# Altium PCB Timebase_PCB.PcbDoc (part 1 of 2)
Units mm, origin at the board's own origin, x right, y up, seen from the top; angles counter-clockwise.
Board outline 50 x 100.01 mm, 4 copper layers (Top Layer, Int1 (GND), Int2 (PWR), Bottom Layer), stack 1.369 mm thick; 60 components, 58 nets, 317 pads, 674 vias.
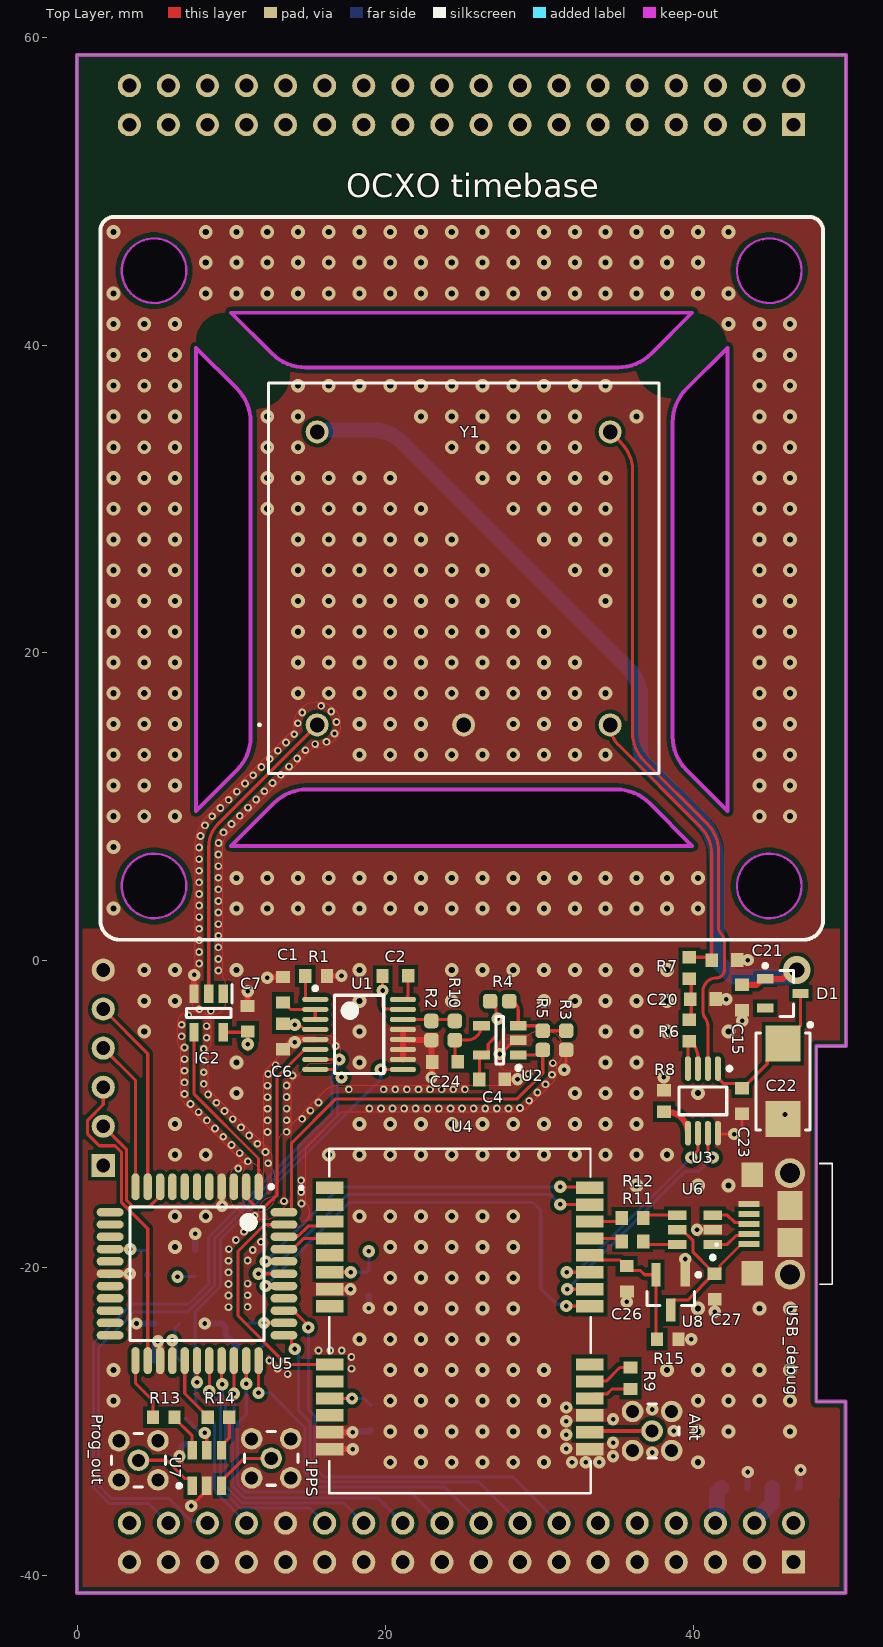
[diagram p0: Top Layer view]
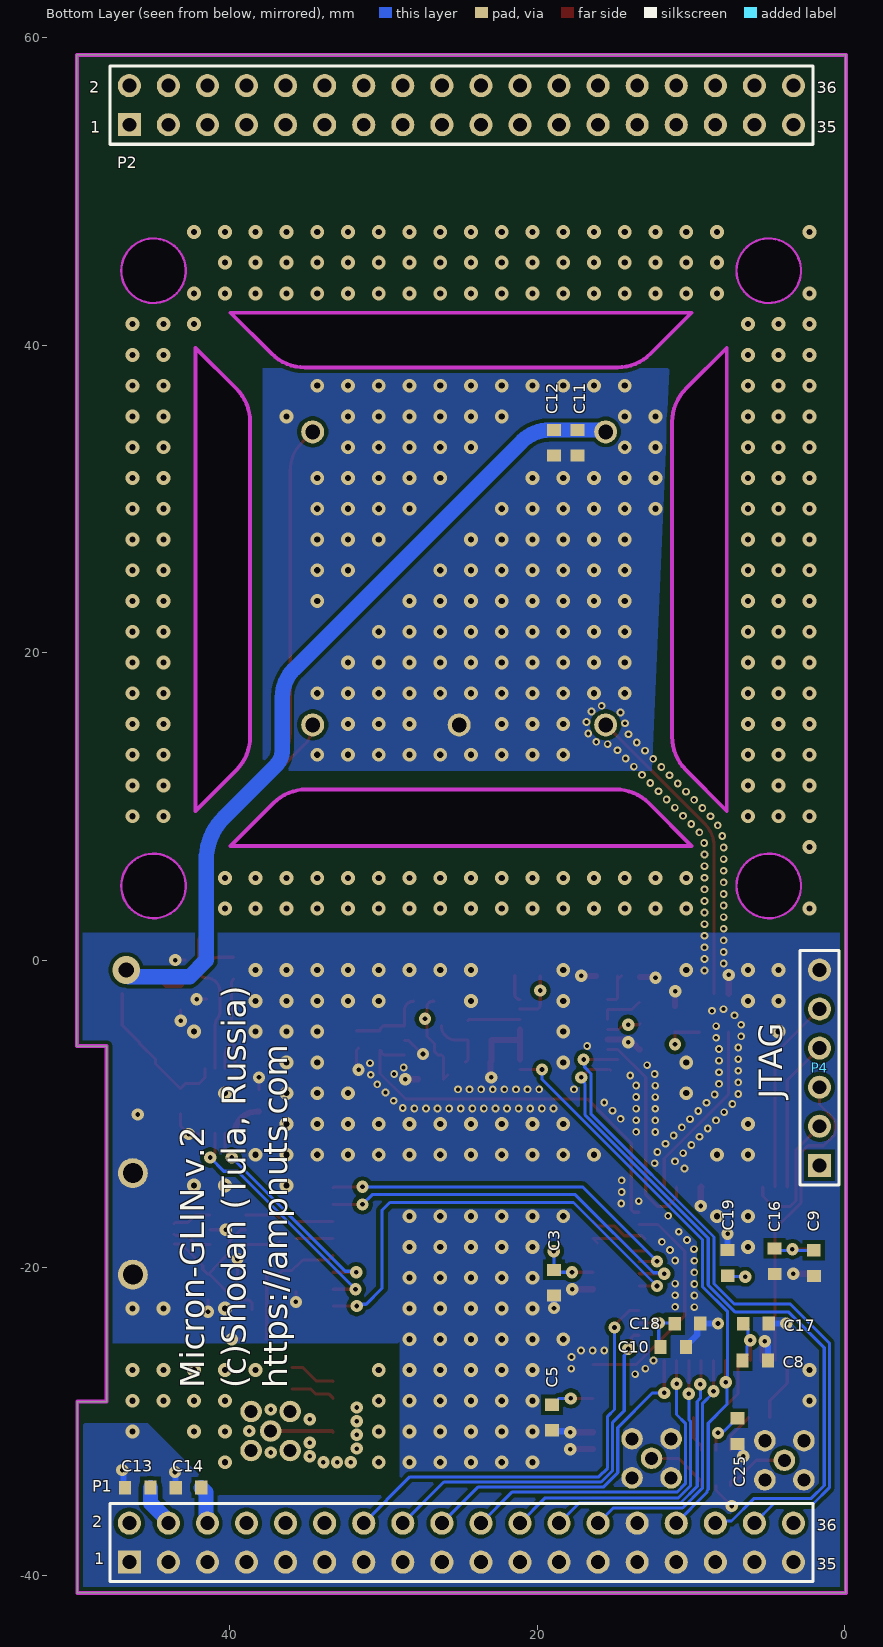
[diagram p1: Bottom Layer view, seen from below]
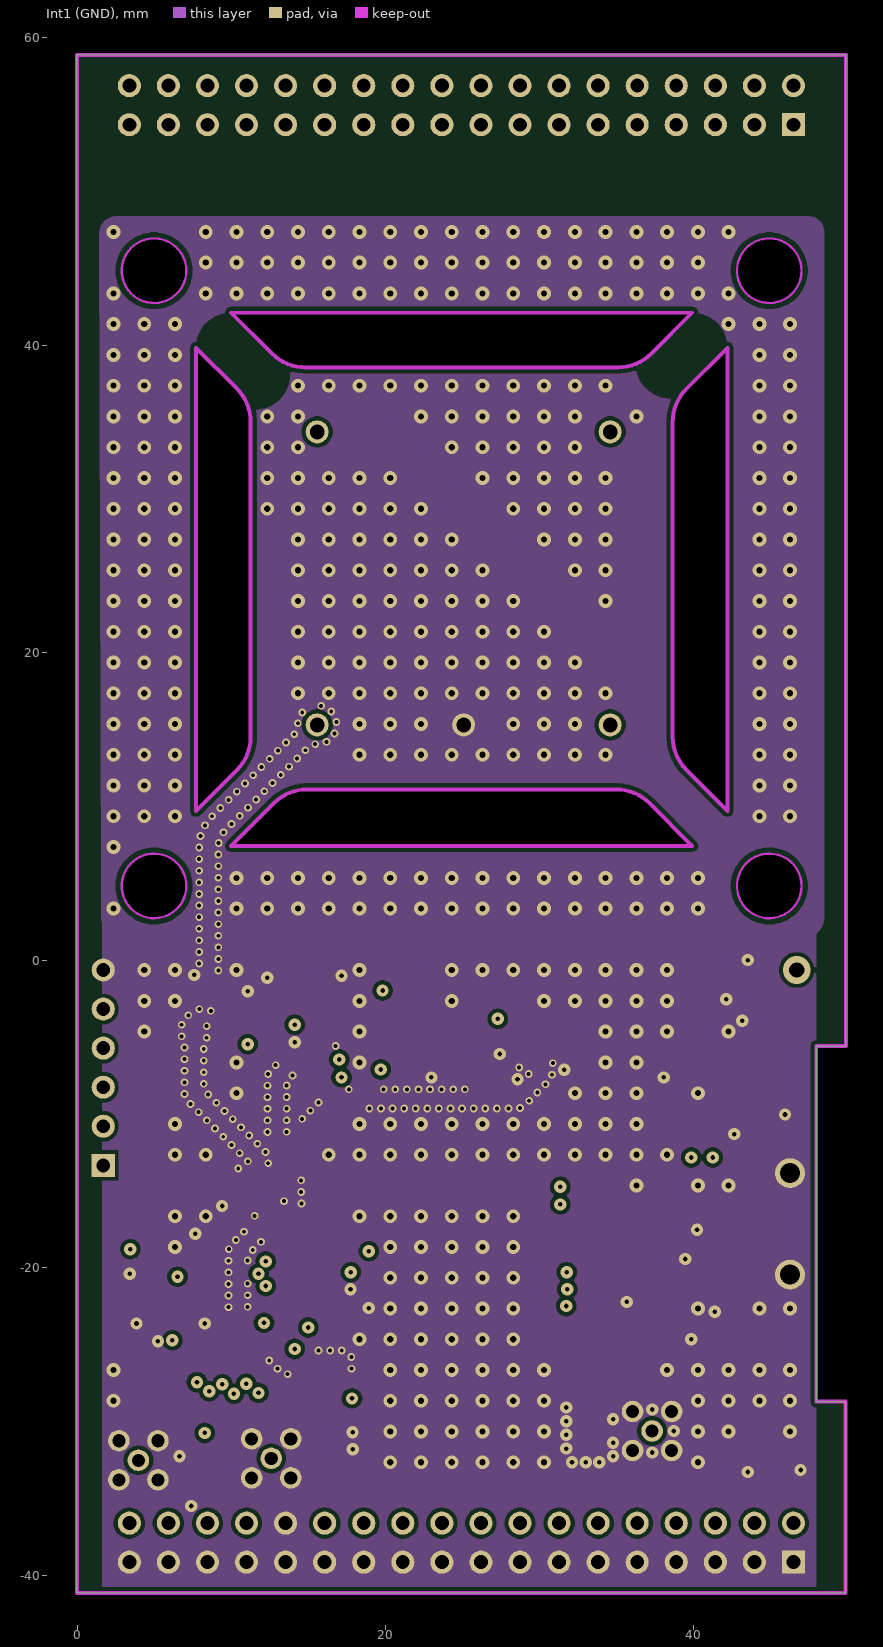
[diagram p2: Int1 (GND)]
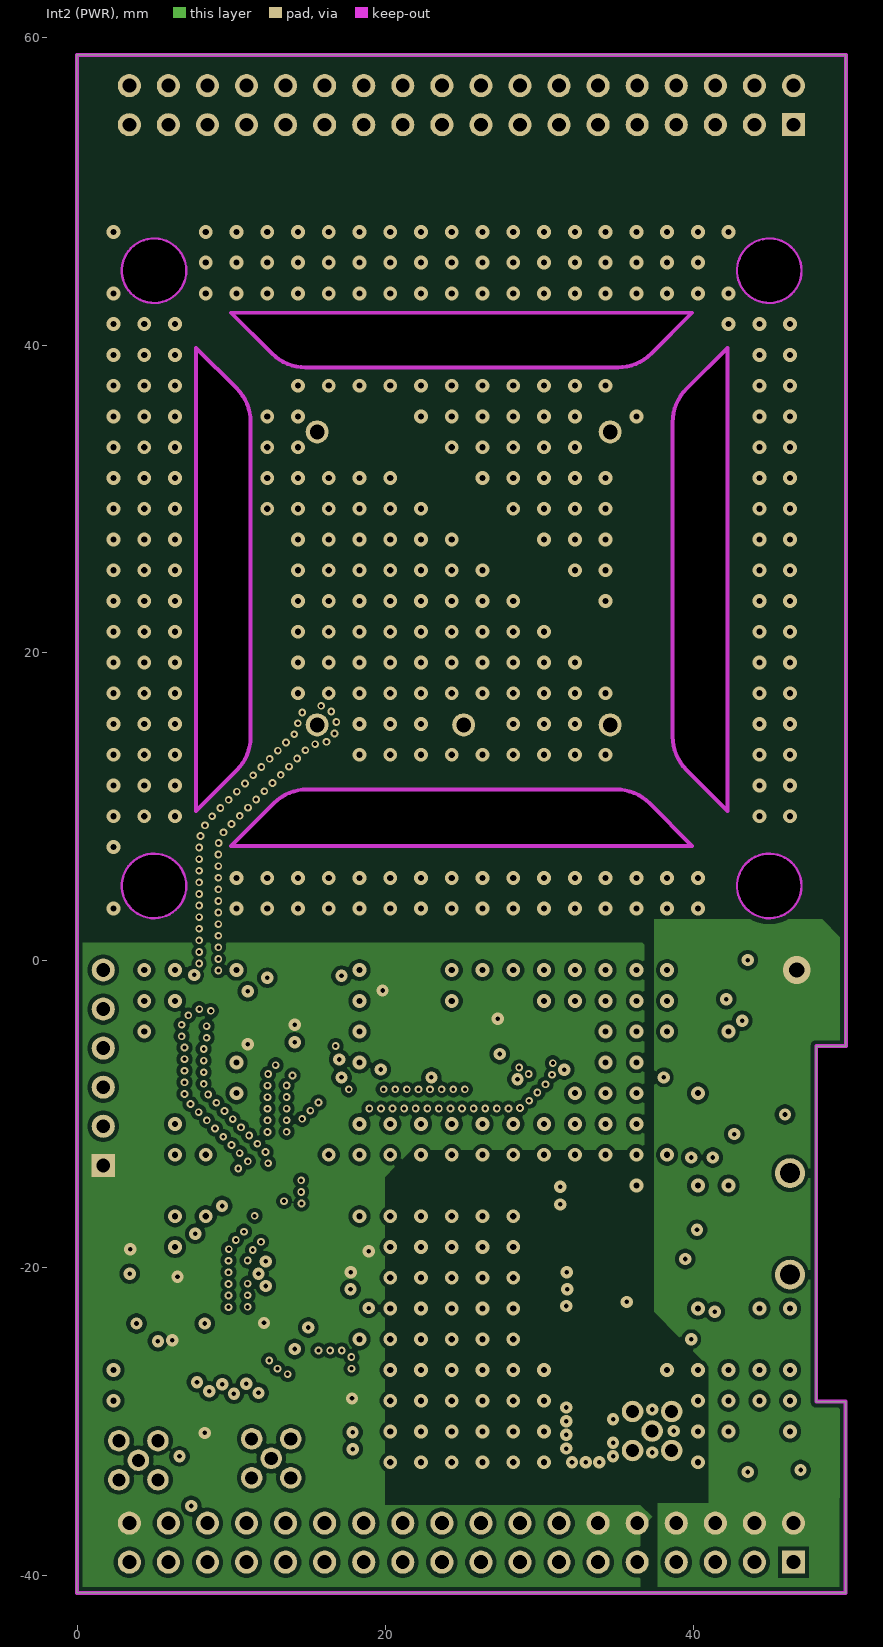
[diagram p3: Int2 (PWR)]

## Layer stack, top to bottom
Top Solder: solder mask 0.0254, SM-001, Dk 4
Top Layer: signal copper 0.035
Dielectric 1: prepreg 0.1295, PP-017, Dk 4.3
Dielectric 2: prepreg 0.1295, PP-017, Dk 4.3
Int1 (GND): signal copper 0.035
Dielectric 3: core 0.7112, Core-039, Dk 4.8
Int2 (PWR): signal copper 0.035
Dielectric 4: prepreg 0.1295, PP-017, Dk 4.3
Dielectric 5: prepreg 0.1295, PP-017, Dk 4.3
Bottom Layer: signal copper 0.035
Bottom Solder: solder mask 0.0254, SM-001, Dk 4

## Board outline
-0.063,-41.136 -0.063,58.864 49.937,58.864 49.937,-5.588 48.006,-5.588 48.006,-28.702 49.911,-28.702 49.911,-41.148 49.899,-41.136
cut-out: 39.57,12.373 cw(c41.738,14.541) 38.672,14.541 38.672,34.988 cw(c41.738,34.988) 39.57,37.156 42.228,39.814 42.228,9.715
cut-out: 9.97,7.429 12.755,10.214 cw(c14.923,8.046) 14.923,11.112 34.989,11.112 cw(c34.989,8.046) 37.157,10.214 39.942,7.429
cut-out: 7.684,9.715 7.684,39.814 10.342,37.156 cw(c8.174,34.988) 11.24,34.988 11.24,14.541 cw(c8.174,14.541) 10.342,12.373
cut-out: 12.628,39.442 ccw(c14.796,41.61) 14.796,38.544 35.116,38.544 ccw(c35.116,41.61) 37.284,39.442 39.942,42.1 9.97,42.1
cut-out: 44.953,42.731 cw(c44.953,44.831) 42.853,44.831 cw(c44.953,44.831) 44.953,46.931 cw(c44.953,44.831) 47.053,44.831 cw(c44.953,44.831)
cut-out: 42.853,4.831 ccw(c44.953,4.831) 44.953,2.731 ccw(c44.953,4.831) 47.053,4.831 ccw(c44.953,4.831) 44.953,6.931 ccw(c44.953,4.831)
cut-out: 4.953,2.731 cw(c4.953,4.831) 2.853,4.831 cw(c4.953,4.831) 4.953,6.931 cw(c4.953,4.831) 7.053,4.831 cw(c4.953,4.831)
cut-out: 4.953,42.731 cw(c4.953,44.831) 2.853,44.831 cw(c4.953,44.831) 4.953,46.931 cw(c4.953,44.831) 7.053,44.831 cw(c4.953,44.831)

## Design rules (kind name [scope] priority, off if disabled: settings)
BoardOutlineClearance [All] p1: gap=0.381 ignorepadtopadclearanceinfootprint=FALSE
Clearance "Clearance Polygons" [InPolygon] p1: gap=0.254 ignorepadtopadclearanceinfootprint=FALSE except(0: Arc-Hole Track-Hole SMDPad-Hole THPad-Hole Via-Hole Fill-Hole Poly-Hole Region-Hole Text-Hole)
Clearance [All] p2: gap=0.127 ignorepadtopadclearanceinfootprint=FALSE except(0: Arc-Hole Track-Hole SMDPad-Hole THPad-Hole Via-Hole Fill-Hole Poly-Hole Region-Hole Text-Hole)
ComponentClearance "HM-TRP & UFL" [InComponent('X1') vs InComponent('U1')] p1: gap=0 collisioncheckmode=3 verticalgap=0 showdistances=FALSE
ComponentClearance [All] p2: gap=0.025 collisioncheckmode=3 verticalgap=0.025 showdistances=FALSE
DiffPairsRouting [All] p1: maxlimit=10 minlimit=0.127 mostfreqgap=0.203 toplayer_minwidth=0.127 toplayer_maxwidth=0.381 toplayer_prefwidth=0.203 midlayer1_minwidth=0.127 midlayer1_maxwidth=0.381 midlayer1_prefwidth=0.203 midlayer2_minwidth=0.127 midlayer2_maxwidth=0.381 midlayer2_prefwidth=0.203 bottomlayer_minwidth=0.127 bottomlayer_maxwidth=0.381 bottomlayer_prefwidth=0.203 maxuncoupledlength=12.7
HoleSize [All] p1: absolutevalues=TRUE maxlimit=6.731 minlimit=0.254 maxpercent=80.000 minpercent=20.000
HoleToHoleClearance [All] p1: gap=0.254 allowstackedmicrovias=FALSE
MinimumAnnularRing [All] p1: minimumring=0.102
MinimumSolderMaskSliver [All] p1: minsoldermaskwidth=0
PlaneClearance [All] p1: clearance=0.254
PlaneConnect [All] p1: planeconnectstyle=Relief reliefexpansion=0.102 reliefentries=4 reliefconductorwidth=0.152 reliefairgap=0.152
PolygonConnect PolygonConnect_pwr_gnd [IsPoly] p1: connectstyle=Direct reliefconductorwidth=0.254 reliefentries=4 polygonreliefangle="90 Angle" airgapwidth=0.152
PolygonConnect PolygonConnect_1 [All] p2: connectstyle=Relief reliefconductorwidth=0.254 reliefentries=4 polygonreliefangle="90 Angle" airgapwidth=0.254
PolygonConnect "Via connect style" [isVia] p3: connectstyle=Direct reliefconductorwidth=0.254 reliefentries=4 polygonreliefangle="90 Angle" airgapwidth=0.254
RoutingCorners [All] p1: cornerstyle=45-Degree minsetback=1.25 maxsetback=1.25
RoutingVias [All] p1: holewidth=0.305 width=0.559 viastyle="Through Hole" minholewidth=0.254 minwidth=0.457 maxholewidth=2.54 maxwidth=2.896
SilkToSilkClearance [All] p1: silktosilkclearance=0
SilkToSolderMaskClearance [IsPad] p1: minsilkscreentomaskgap=0.127 clearancetoexposedcopper=TRUE
SolderMaskExpansion [All] p1: expansion=0.064 istentingtop=FALSE
Width GND [InNet('GND')] p1: maxlimit=0.762 minlimit=0.254 preferedwidth=0.508
Width Power [InNetClass('Power')] p2: maxlimit=1.016 minlimit=0.508 preferedwidth=0.762
Width 3V3 [InNetClass('3V3')] p3: maxlimit=0.762 minlimit=0.254 preferedwidth=0.508
Width [All] p4: maxlimit=10.16 minlimit=0.152 preferedwidth=0.203
20 further rules are at their usual default settings.

## Components (designator, comment, footprint, x,y, rotation, side; value= is the part's Value field where it differs from the comment)
1PPS "MMCX" MMCX2.54-V5 12.573,-32.385 r0 top
Ant "MMCX" MMCX2.54-V5 37.338,-30.607 r90 top
C1 "10nF" "CAP 0603" 13.335,-1.905 r90 top
C2 "10nF" "CAP 0603" 20.652,-1.006 r0 top
C3 "100nF" "CAP 0603" 18.923,-20.955 r90 bottom
C4 "100nF" "CAP 0603" 26.924,-7.747 r180 top
C5 "100nF" "CAP 0603" 19.05,-29.718 r90 bottom
C6 "100nF" "CAP 0603" 13.335,-4.953 r90 top
C7 "100nF" "CAP 0603" 11.049,-3.81 r270 top
C8 "100nF" "CAP 0603" 5.842,-26.035 r0 bottom
C9 "100nF" "CAP 0603" 2.032,-19.685 r90 bottom
C10 "100nF" "CAP 0603" 11.176,-25.146 r0 bottom
C11 "100nF" "CAP 0603" 17.399,33.655 r90 bottom
C12 "10uF" "CAP 0603" 18.923,33.655 r90 bottom
C13 "100nF" "CAP 0603" 45.974,-34.29 r180 bottom
C14 "10nF" "CAP 0603" 42.672,-34.29 r180 bottom
C15 "1uF" "CAP 0603" 43.18,-2.413 r90 top
C16 "10nF" "CAP 0603" 4.572,-19.558 r90 bottom
C17 "10nF" "CAP 0603" 5.793,-23.632 r0 bottom
C18 "10nF" "CAP 0603" 10.238,-23.632 r0 bottom
C19 "1uF" "CAP 0603" 7.62,-19.685 r270 bottom
C20 "1uF" "CAP 0603" 40.64,-2.54 r180 top
C21 "1uF" "CAP 0603" 42.037,0 r180 top
C22 "10uF 16V C" CAPMP6032X280N 45.847,-7.874 r270 top
C23 "100nF" "CAP 0603" 43.18,-9.144 r90 top
C24 "10nF" "CAP 0603" 23.876,-6.604 r0 top
C25 "100nF" "CAP 0603" 6.985,-30.607 r90 bottom
C26 "1uF" "CAP 0603" 35.687,-20.701 r90 top
C27 "1uF" "CAP 0603" 41.402,-21.209 r90 top
D1 "BAV99" INF-SOT23_N 45.84,-2.159 r0 top
IC2 "SN74LV1T34DBVR" SOT95P280X145-5N 8.509,-3.429 r270 top
P1 "Header 18X2" HDR2X18 46.527,-39.136 r180 bottom locked
P2 "Header 18X2" HDR2X18 46.527,54.324 r180 bottom locked
P4 "JTAG" HDR1X6 1.651,-13.335 r90 bottom
Prog_out "MMCX" MMCX2.54-V5 3.937,-32.512 r90 top
R1 "3.9K" 1608[0603] 15.494,-1.016 r0 top
R2 "300R" "Yegeo 0603" 22.987,-4.572 r90 top
R3 "3.3K" "Yegeo 0603" 31.75,-5.207 r270 top
R4 "22K" "Yegeo 0603" 27.432,-2.667 r180 top
R5 "12K" "Yegeo 0603" 30.226,-5.207 r90 top
R6 "10K" 1608[0603] 39.751,-4.572 r270 top
R7 "10K" 1608[0603] 39.751,-0.508 r270 top
R8 "0R" 1608[0603] 38.1,-9.144 r90 top
R9 "0R" 1608[0603] 35.941,-27.178 r270 top
R10 "3.3K" "Yegeo 0603" 24.511,-4.572 r90 top
R11 "27R" 1608[0603] 36.068,-18.288 r0 top
R12 "27R" 1608[0603] 36.068,-16.764 r0 top
R13 "49.9R" 1608[0603] 5.588,-29.718 r0 top
R14 "49.9R" 1608[0603] 9.144,-29.718 r0 top
R15 "100K" 1608[0603] 38.354,-24.638 r0 top
U1 "AD9832BRUZ" ADI-RU-16_N 18.288,-4.826 r0 top
U2 "LTC6752HS5" TI-DBV5_N 27.432,-5.207 r180 top
U3 "DAC8571IDGK" TI-DGK8_N 40.64,-9.144 r270 top
U4 "LEA-M8F" LEA 24.829,-23.289 r180 top
U5 "XC9572XL-10VQG44C" VQG44_N 7.747,-20.382 r270 top
U6 "USBLC6-2" SOT23-6L 40.132,-17.526 r180 top
U7 "USBLC6-2" SOT23-6L 8.382,-33.02 r90 top
U8 "MCP1702T-3302E/CB" SOT-23A-CB3_N 38.542,-21.597 r270 top
USB_debug "10118193-0001LF" 101181930001LF 46.228,-17.145 r90 top
Y1 "Vectron C4550A1-0213" C4550C508SV120RFSA11128MHZ 15.558,15.303 r0 top locked

## Footprints (in the part's own frame and the unit in brackets; to place one, negate y for a bottom-side part, rotate by r counter-clockwise, add the part's x,y. Pads: shape width x height; smd on the part's side, far side on the other; paste and mask are expansions set on the pad)
1608[0603] [mm]
  rect 0.8x0.9 smd: 1(-0.7,0) 2(0.7,0)
  body extent -0.87,-0.48 0.87,0.48, height 1.3
101181930001LF [mm]
  rect 0.4x1.35 smd: 1(-1.3,2.6) 2(-0.65,2.6) 3(0,2.6) 4(0.65,2.6) 5(1.3,2.6)
  round 1.95 hole 1.3: MH1(-3.3,-0.075) MH2(3.3,-0.075)
  rect 1.6x1.4 smd: MP1(-3.2,2.375) MP4(3.2,2.375)
  rect 1.9x1.6 smd: MP2(-1.2,-0.075) MP3(1.2,-0.075)
  silkscreen extent -3.93,-2.83 3.93,4.75, body extent -3.93,-2.83 3.93,3.23, height 3.2
ADI-RU-16_N [mm]
  oval 1.7x0.35 smd: 1(-2.85,2.275) 2(-2.85,1.625) 3(-2.85,0.975) 4(-2.85,0.325) 5(-2.85,-0.325) 6(-2.85,-0.975) 7(-2.85,-1.625) 8(-2.85,-2.275) 9(2.85,-2.275) 10(2.85,-1.625) 11(2.85,-0.975) 12(2.85,-0.325) 13(2.85,0.325) 14(2.85,0.975) 15(2.85,1.625) 16(2.85,2.275)
  silkscreen extent -2.97,-2.55 1.6,3.12, body extent -2.25,-2.55 2.25,2.55, height 1.2
C4550C508SV120RFSA11128MHZ [mm]
  round 1.493 hole 0.96: 1(0,0) 2(9.525,0) 3(19.05,0) 4(19.05,19.05) 5(0,19.05)
  silkscreen extent -3.8,-3.17 22.22,22.22, body extent -3.17,-3.17 22.22,22.22, height 11.35
"CAP 0603" [mm] "Chip Capacitor, 2-Leads, Body 1,60x0,80mm, IPC Medium Density"
  rect 0.8x0.9 smd: 1(-0.84,-0.01) 2(0.82,0)
  body extent -0.85,-0.45 0.85,0.45, height 0.8
CAPMP6032X280N [mm] "Capacitor, Polarized, Molded  Body 6.0x3.2mm, IPC Medium Density"
  rect 2.35x2.25 smd: 1(-2.45,0) 2(2.45,0)
  silkscreen extent -3.8,-1.75 3.15,1.9, body extent -3.15,-1.75 3.15,1.75, height 2.8
HDR1X6 [mm] "Connector; Header; 6 Position"
  rect 1.5x1.5 hole 0.9: 1(0,0)
  round 1.5 hole 0.9: 2(2.54,0) 3(5.08,0) 4(7.62,0) 5(10.16,0) 6(12.7,0)
  silkscreen extent -1.27,-1.27 13.97,1.27
HDR2X18 [mm] "Connector; Header; 18x2 Position"
  rect 1.5x1.5 hole 0.9: 1(0,0)
  round 1.5 hole 0.9: 2(0,2.54) 3(2.54,0) 4(2.54,2.54) 5(5.08,0) 6(5.08,2.54) 7(7.62,0) 8(7.62,2.54) 9(10.16,0) 10(10.16,2.54) 11(12.7,0) 12(12.7,2.54) 13(15.24,0) 14(15.24,2.54) 15(17.78,0) 16(17.78,2.54) 17(20.32,0) 18(20.32,2.54) 19(22.86,0) 20(22.86,2.54) 21(25.4,0) 22(25.4,2.54) 23(27.94,0) 24(27.94,2.54) 25(30.48,0) 26(30.48,2.54) 27(33.02,0) 28(33.02,2.54) 29(35.56,0) 30(35.56,2.54) 31(38.1,0) 32(38.1,2.54) 33(40.64,0) 34(40.64,2.54) 35(43.18,0) 36(43.18,2.54)
  silkscreen extent -1.27,-1.27 44.45,3.81
INF-SOT23_N [mm] "SOT23, 3-Leads, Body 2.9x1.3 mm, Pitch 0.95 mm, IPC Medium Density"
  rect 1.05x0.6 smd: 1(-1.15,0.95) 2(-1.15,-0.95) 3(1.15,0)
  silkscreen extent -1.27,-1.5 0.7,1.92, body extent -0.7,-1.5 0.7,1.5, height 1.1
LEA [mm] "u-blox LEA GNSS module"
  rect 1.8x0.8 smd paste-4: 1(8.446,-8.5)
  rect 1.8x0.8 smd paste-0.4 mask+0.102: 2(8.446,-7.4) 3(8.446,-6.3) 4(8.445,-5.2) 5(8.445,-4.1) 6(8.445,-3) 7(8.445,-1.9) 8(8.445,-0.8) 9(8.445,3) 10(8.445,4.1) 11(8.445,5.2) 12(8.445,6.3) 13(8.445,7.4) 14(8.445,8.5) 16(-8.446,7.4) 17(-8.446,6.3) 18(-8.445,5.2) 19(-8.445,4.1) 20(-8.445,3) 21(-8.445,-0.8) 22(-8.445,-1.9) 23(-8.445,-3) 24(-8.445,-4.1) 25(-8.445,-5.2) 26(-8.445,-6.3) 27(-8.445,-7.4) 28(-8.445,-8.5)
  rect 1.8x0.8 smd paste-0.4: 15(-8.446,8.5)
  silkscreen extent -8.51,-11.04 10.33,11.36, body extent -8.5,-11.01 8.5,11.39, height 2.35
MMCX2.54-V5 [mm]
  round 1.4 hole 0.85: 1(0,0) 2(-1.27,-1.27) 3(1.27,-1.27) 4(1.27,1.27) 5(-1.27,1.27)
  silkscreen extent -1.75,-1.75 1.75,1.75, body extent -1.78,-1.75 1.73,1.75, height 4.42
SOT23-6L [mm]
  rect 1.2x0.6 smd: 1(-1.15,0.95) 2(-1.15,0) 3(-1.15,-0.95) 4(1.15,-0.95) 5(1.15,0) 6(1.15,0.95)
  silkscreen extent -1.28,1.68 -1.03,1.92, body extent -0.75,-1.52 0.75,1.53, height 1.45
SOT95P280X145-5N [mm]
  rect 1.2x0.6 smd: 1(-1.25,0.95) 2(-1.25,0) 3(-1.25,-0.95) 4(1.25,-0.95) 5(1.25,0.95)
  silkscreen extent -1.85,-1.45 0.3,1.5, body extent -1.4,-1.45 1.4,1.45, height 1.2
SOT-23A-CB3_N [mm] "SOT346, 3-Leads, Body 2.9x1.5mm, Pitch 0.95mm, Lead Span 2.6mm, IPC Medium Density"
  rect 1.5x0.6 smd: 1(-1.15,0.95) 2(-1.15,-0.95) 3(1.15,0)
  silkscreen extent -1.27,-1.55 0.85,1.93, body extent -0.85,-1.55 0.85,1.55, height 1.45
TI-DBV5_N [mm] "SOT23, 5-Leads, Body 2.9x1.6mm, Pitch 0.95mm, IPC Medium Density"
  rect 1.1x0.6 smd: 1(-1.2,0.95) 2(-1.2,0) 3(-1.2,-0.95) 4(1.2,-0.95) 5(1.2,0.95)
  silkscreen extent -1.33,-1.55 0.25,1.92, body extent -0.87,-1.52 0.87,1.53, height 1.45
TI-DGK8_N [mm] "SOP, 8-Leads, Body 3x3mm, Pitch 0.65mm, IPC Medium Density"
  oval 1.6x0.4 smd: 1(-2.1,0.975) 2(-2.1,0.325) 3(-2.1,-0.325) 4(-2.1,-0.975) 5(2.1,-0.975) 6(2.1,-0.325) 7(2.1,0.325) 8(2.1,0.975)
  silkscreen extent -2.22,-1.55 0.9,1.85, body extent -1.55,-1.55 1.55,1.55, height 1.1
VQG44_N [mm] "Thin QFP, 44-Leads, Body 10x10mm, Pitch 0.8mm, IPC Medium Density"
  oval 1.75x0.55 smd: 1(-5.65,4) 2(-5.65,3.2) 3(-5.65,2.4) 4(-5.65,1.6) 5(-5.65,0.8) 6(-5.65,0) 7(-5.65,-0.8) 8(-5.65,-1.6) 9(-5.65,-2.4) 10(-5.65,-3.2) 11(-5.65,-4) 23(5.65,-4) 24(5.65,-3.2) 25(5.65,-2.4) 26(5.65,-1.6) 27(5.65,-0.8) 28(5.65,0) 29(5.65,0.8) 30(5.65,1.6) 31(5.65,2.4) 32(5.65,3.2) 33(5.65,4)
  oval 0.55x1.75 smd: 12(-4,-5.65) 13(-3.2,-5.65) 14(-2.4,-5.65) 15(-1.6,-5.65) 16(-0.8,-5.65) 17(0,-5.65) 18(0.8,-5.65) 19(1.6,-5.65) 20(2.4,-5.65) 21(3.2,-5.65) 22(4,-5.65) 34(4,5.65) 35(3.2,5.65) 36(2.4,5.65) 37(1.6,5.65) 38(0.8,5.65) 39(0,5.65) 40(-0.8,5.65) 41(-1.6,5.65) 42(-2.4,5.65) 43(-3.2,5.65) 44(-4,5.65)
  silkscreen extent -5.77,-4.35 4.35,4.95, body extent -5,-5 5,5, height 1.2
"Yegeo 0603" [mm]
  rrect50% 0.95x0.95 smd: 1(-0.625,0) 2(0.625,0)
  body extent -0.85,-0.45 0.85,0.45, height 0.8

## Part data
1PPS Ant Prog_out: library part COAX-M, "RF Coaxial PCB Connector, MMCX; Thru-Hole, Vertical Mount Plug,  50 Ohm Impedance", PackageDocument="Rev. A, 16-Jun-1997", ComponentLink1Description="Manufacturer Link", ComponentLink1URL=http://www.amphenolrf.com/, DatasheetDocument=30-May-2003, DrillSize="Corresponds to nominal value.", LatestRevisionDate=15-Jul-2004, LatestRevisionNote="Component Replaced.", PackageReference=908-21103, PCB_Layout="Complies with manufacturer's recommendation.", Published=15-Jul-2004, Publisher="Altium Limited"
C1 C2 C3 C4 C5 C6 C7 C8 C9 C10 C11 C12 C13 C14 C15 C16 C17 C18 C19 C20 C21 C23 C24 C25 C26 C27: library part "Cap Semi", "Capacitor (Semiconductor SIM Model)", LatestRevisionDate=29-May-2009, LatestRevisionNote="IPC-7351 Footprint Added.", Order=CC0603KRX7R8BB104, PackageDescription="Chip Capacitor", PackageReference=C1206, Published=8-Jun-2000, Publisher="Altium Limited"
C22: library part CTE6032-28_10UF_25V_10%_LESR0500, "Polarised capacitor", Case=C, Manufacturer=GENERIC, Manufacturer1 ComponentHeight=2.8mm, Manufacturer1 Example=AVX, Manufacturer1 Part Number=TPSC106K025R0500, Tolerance=±10%, Voltage=25V, Author="CERN DEM JLC", Component Type=Standard, CreateDate=05.05.2008, HelpURL=\\cern.ch\dfs\Applications\Altium\Datasheets\CTE-LESR_AVX_TPS.pdf, LatestRevisionDate=20.01.2009, Manufacturer Part Number=CTE6032-28_10UF_25V_10%_LESR0500, Mounted=Yes, Part Description="Low ESR 0R5 Solid Tantalum Chip Capacitor", Part Number=CTE6032-28_10UF_25V_10%_LESR0500, Pin Count=2, Sense=No, SMD=Yes, Socket=No, Status=Preferred
D1: "Silicon Switching Diode, SOT23, Reel, Green", Manufacturer=Infineon, Supplier Part Number 1=8_hDx09NysxyY_EZJdaSbs5L1p9U5ut-2MaZMQWGOaA, ComponentLink1Description="Manufacturer URL", ComponentLink1URL=http://www.infineon.com/, ComponentLink2Description=Datasheet, ComponentLink2URL=http://www.infineon.com/dgdl/bav99series.pdf?folderId=db3a30431400ef6801141b5844e103ea&fileId=db3a30431400ef6801141c1b237d042f, ComponentLink3Description="Package Specification", ComponentLink3URL=http://www.infineon.com/dgdl/smbta14_mmbta14.pdf?folderId=db3a30431441fb5d011445c30f210183&fileId=db3a30431441fb5d011445ef0201018c, Green=TRUE, Mounting Technology="Surface Mount", PackageDescription="3-Pin Small Outline Transistor Package, 1.3 x 2.9 mm Body, 0.95 mm Pitch", PackageReference=SOT23, PackageVersion=Apr-08, Packing=Reel, PartNumber=BAV99, Supplier 1=Arrow, Supplier 2=Farnell, Supplier 3=Farnell, Supplier Part Number 2=1056504RL, Supplier Part Number 3=1056504
IC2: "Integrated Circuit", Manufacturer_Name="Texas Instruments", Mouser Part Number=595-SN74LV1T34DBVR, Arrow Part Number=SN74LV1T34DBVR, Arrow Price/Stock=https://www.arrow.com/en/products/sn74lv1t34dbvr/texas-instruments?region=nac, Datasheet Link=http://www.ti.com/lit/gpn/sn74lv1t34, Height=1.45mm, Manufacturer_Part_Number=SN74LV1T34DBVR, Mouser Price/Stock=https://www.mouser.co.uk/ProductDetail/Texas-Instruments/SN74LV1T34DBVR?qs=8sOby8ZxZLE4ekkxA3S6Wg%3D%3D
P1 P2: "Header, 18-Pin, Dual row", LatestRevisionDate=17-Jul-2002, LatestRevisionNote="Re-released for DXP Platform.", Publisher="Altium Limited", System=Connector
P4: library part "Header 6", "Header, 6-Pin", LatestRevisionDate=17-Jul-2002, LatestRevisionNote="Re-released for DXP Platform.", Publisher="Altium Limited"
R1 R2 R3 R4 R5 R6 R7 R8 R9 R10 R11 R12 R13 R14 R15: library part "Resistor 0805", Avail=20
  R1 R2 R3 R4 R5 R10: Order=ERA-3AEB49R9V
  R6 R7 R8 R9 R11 R12 R13 R14 R15: Order=CR0603-JW-220GLF
U1: "25 MHz Direct Digital Synthesizer, Waveform Generator, 10-Bit, Serial, RU-16, 96 Tube, Pb-Free", Code_JEDEC=MO-153AB, Compliance Range (V)=1.35V, ComponentLink1Description="Manufacturer URL", ComponentLink1URL=www.analog.com, ComponentLink2Description=Datasheet, ComponentLink2URL=http://www.analog.com/static/imported-files/data_sheets/AD9832.pdf, ComponentLink3Description="Package Specification", ComponentLink3URL=http://www.analog.com/static/imported-files/packages/36244347913743854010197452789RU16.pdf, DatasheetVersion="Rev. C", FS Iout (mA nom)=4mA, I Supply total (max)=15mA, I/O Interface=Serial, Master fclk=25MHz, PackageDescription="16-Lead Thin Shrink Small Outline Package [TSSOP]", PackageReference=RU-16, PackageVersion=Nov-2002, REFCLK Multiplier=No, Resolution (Bits)=10bit, Tuning Word Width (bits)=32bit
U2: library part OPA353NA/250, "High-Speed, Single-Supply, Rail-to-Rail Operational Amplifier MicroAmplifier(TM) Series, 2.7 to 5.5 V, -40 to 85 degC, 5-pin SOT23 (DBV5), Green (RoHS & no Sb/Br)", Manufacturer="Texas Instruments", Rating=Catalog, Supplier Part Number 1=OPA353NATR-ND, Total Supply Voltage(Max)(+5V is 5, +/-5V is 10)=5.5, Total Supply Voltage(Min)(+5V is 5, +/-5V is 10)=2.7, CMRR(Min)(dB)=76, Code_JEDEC=MO-178, ComponentLink1Description="Manufacturer URL", ComponentLink1URL=http://www.ti.com/, ComponentLink2Description=Datasheet, ComponentLink2URL=http://www.ti.com/lit/ds/symlink/opa353.pdf, ComponentLink3Description="Package Specification", ComponentLink3URL=http://www.ti.com/litv/pdf/mpds018i, DatasheetVersion=SBOS103, Eco-Plan="Green (RoHS & no Sb/Br)", GBW(Typ)(MHz)=44, IIB(Max)(pA)=10, Iq per channel(Max)(mA)=8, Mounting Technology="Surface Mount", Number of Channels=1, Offset Drift(Typ)(uV/C)=5, PackageDescription="5-Pin Plastic Small Outline, Body 1.6 x 2.9 mm, Pitch 0.95 mm", PackageReference=DBV5, PackageVersion="4073253-4/K, 03/2006", Packing="SMALL T&R", PartNumber=OPA353NA/250, Slew Rate(Typ)(V/us)=22, Sub Family="High Output Current Amplifier (>=50mA), Low Input Bias Current Amp (<=10pA), Low Supply Voltage Amplifier (<=2.7V), Precision Amplifier", Supplier 1=Digi-Key, Supplier 2=Digi-Key, Supplier 3=Digi-Key, Supplier 4=Farnell, Supplier 5=Farnell, Supplier 6=Newark, Supplier 7=Mouser, Supplier Part Number 2=OPA353NACT-ND, Supplier Part Number 3=OPA353NADKR-ND, Supplier Part Number 4=1207049, Supplier Part Number 5=1207049RL, Supplier Part Number 6=35C1895, Supplier Part Number 7=595-OPA353NA/250, Vio (25C)(Max)(mV)=8
U3: "Low-Power Rail-to-Rail Output 16-Bit I2C Input DAC, -40 to 105 degC, 8-pin SOP (DGK8), Green (RoHS & no Sb/Br)", Manufacturer="Texas Instruments", Power Consumption(Typ)(mW)=0.42, Supplier Part Number 1=296-26051-5-ND, Code_JEDEC=MO-187, ComponentLink1Description="Manufacturer URL", ComponentLink1URL=http://www.ti.com/, ComponentLink2Description=Datasheet, ComponentLink2URL=http://www.ti.com/general/docs/lit/getliterature.tsp?genericPartNumber=DAC8571&fileType=pdf, ComponentLink3Description="Package Specification", ComponentLink3URL=http://www.ti.com/litv/pdf/mpds028d, DAC Channels=1, DatasheetVersion=SLAS373A, DNL(Max)(+/-LSB)=1, Eco-Plan="Green (RoHS & no Sb/Br)", INL(Max)(+/-LSB)=65, Interface="Serial I2C", Mounting Technology="Surface Mount", PackageDescription="8-Pin Thin Small Outline, Body 3 x 3 mm, Pitch 0.65 mm", PackageReference=DGK8, PackageVersion="4073329/E, 05/2006", PartNumber=DAC8571IDGK, Resolution(Bits)=16, Settling Time(us)=8, SubFamily="Precision DAC (=<10MSPS)", Supplier 1=Digi-Key, Supplier 2=Newark, Supplier 3=Mouser, Supplier Part Number 2=20H5068, Supplier Part Number 3=595-DAC8571IDGK
U4: library part LEA, "u-blox LEA GNSS module", Manufacturer=u-blox, Part Description="u-blox LEA-M8 GNSS module"
U5: "FastFLASH XC900XL, 3.3V High-Performance 72 Macrocell CPLD, 34 User I/Os, 44-Pin VQFP, Speed Grade 10, Commercial Grade, Pb-Free", Supplier Part Number 1=122-1448-ND, Code_JEDEC=MS-026-ACB, ComponentLink1Description="XC9572XL Datasheet", ComponentLink1URL=http://www.xilinx.com/support/documentation/data_sheets/ds057.pdf, ComponentLink2Description="VQG44 Package Drawing", ComponentLink2URL=http://www.xilinx.com/support/documentation/package_specs/vq44.pdf, ComponentLink3Description="XC9500XL Documents", ComponentLink3URL=http://www.xilinx.com/support/documentation/xc9500xl.htm, ComponentLink4Description="Xilinx.com Home", ComponentLink4URL=http://www.xilinx.com, DatasheetVersion="ver2.0 Apr-2007", LatestRevisionDate=18-Nov-2009, LatestRevisionNote="Updated to datasheet version 2.5 May-2009.", PackageDescription="44-Pin Very Thin Quad Flat Pack (VQG44) - Pb-Free", PackageReference=VQG44, PackageVersion="ver1.2, Jun-2004", Published=8-Sep-2006, Publisher="Altium Limited", Supplier 1=Digi-Key, Supplier 2=Farnell, Supplier 3=Newark, Supplier Part Number 2=1605849, Supplier Part Number 3=12N2472
U8: "250 mA Low Quiescent Current LDO Regulator, 3-Pin SOT-23A, Extended Temperature, Tape and Reel", Supplier Part Number 1=MCP1702T-3302E/CBTR-ND, ComponentLink1Description=Datasheet, ComponentLink1URL=http://ww1.microchip.com/downloads/en/DeviceDoc/22008d.pdf, ComponentLink2Description="Packaging Specification", ComponentLink2URL=http://www.microchip.com/stellent/groups/techpub_sg/documents/packagingspec/en012702.pdf, ComponentLink3Description="Microchip.com Home", ComponentLink3URL=http://www.microchip.com/, DatasheetVersion="revD, Jun-2009", LatestRevisionDate=02-Dec-2009, LatestRevisionNote="Updated to datasheet revision D, Jun-2009", PackageDescription="3-Lead Plastic Small Outline Transistor (CB) [SOT-23A]", PackageReference=SOT-23A-CB3, PackageVersion="revBB, Aug-2009", Published=29-Jan-2009, Publisher="Altium Limited", Supplier 1=Digi-Key, Supplier 2=Digi-Key, Supplier 3=Digi-Key, Supplier 4=Farnell, Supplier Part Number 2=MCP1702T-3302E/CBCT-ND, Supplier Part Number 3=MCP1702T-3302E/CBDKR-ND, Supplier Part Number 4=1331490
USB_debug: "Connector", Manufacturer_Name=Amphenol, Mouser Part Number=649-10118193-0001LF, Arrow Part Number=10118193-0001LF, Arrow Price/Stock=https://www.arrow.com/en/products/10118193-0001lf/amphenol-fci?region=nac, Datasheet Link=https://datasheet.datasheetarchive.com/originals/distributors/Datasheets_SAMA/035be5b62fc6b7a9cadde58b72893b5e.pdf, Height=3.1mm, Manufacturer_Part_Number=10118193-0001LF, Mouser Price/Stock=https://www.mouser.co.uk/ProductDetail/Amphenol-FCI/10118193-0001LF?qs=Ywefl8B65e63Nsqd%252B8HZaQ%3D%3D
Y1: library part C4550C508SV120RFSA1112.8MHZ, "Crystal or Oscillator", Manufacturer_Name=Vectron, Height=11.25mm, Manufacturer_Part_Number="Vectron C4550A1-0213"
U6 U7: Avail=1, Order=USBLC6-2

## Via types
v1: diameter 0.9, hole 0.4, Top Layer to Bottom Layer, tented both sides, 430 vias
v2: diameter 0.5, hole 0.254, Top Layer to Bottom Layer, tented both sides, 163 vias
v3: diameter 0.8, hole 0.3, Top Layer to Bottom Layer, tented both sides, 80 vias
v4: diameter 1.8, hole 1, Top Layer to Bottom Layer, tented both sides, 1 vias

## Nets (pads, with @x,y where several pads share a name; then routed paths per layer and width w, separated by ;. In a path a pad name is that pad's centre, name@x,y a point inside that pad or via, vN(x,y) a via of type N, cw(c..) or ccw(c..) an arc to the next point about the centre after c; other vN are vias at no path point)
1PPS_out: R14.1 U5.27 | length 4.3
  Top Layer w0.203: U5.27@6.947,-26.032 6.947,-28.171 8.444,-29.668 R14.1@8.444,-29.718
"10M OUT": U1.6 U5.2 | length 14.1
  Top Layer w0.203: U5.2@10.947,-14.732 10.947,-15.426 11.523,-16.002 12.192,-16.002 12.954,-15.24 12.954,-7.61 14.763,-5.801 U1.6@15.438,-5.801
"10MHz IN": IC2.4 U5.1 | length 11.8
  Top Layer w0.203: IC2.4@7.559,-4.679 7.559,-8.702 11.747,-12.89 U5.1@11.747,-14.732
+3.3V: C2.1 C3.2 C4.2 C5.2 C6.2 C7.2 C8.2 C9.2 C10.2 C16.2 C17.2 C18.2 C19.2 C25.2 IC2.5 P1.10 P1.12 P1.36 P4.1 R4.2 U1.4 U1.15 U2.5 U4.6 U4.11 U5.15 U5.26 U5.35 U7.5 | length 37.6
  Top Layer w0.203: U5.15@2.097,-18.782 v3(3.415,-18.782) ; U5.26@6.147,-26.032 v3(6.147,-24.714) ; v3(8.255,-30.734) 8.382,-30.861 U7.5@8.382,-31.87 ; IC2.5@9.459,-4.679 11,-4.679 C7.2@11.049,-4.63 v3@11.049,-5.842 ; v3(12.105,-23.582) U5.35@13.397,-23.582 ; C6.2@13.335,-4.133 13.393,-4.191 v3(14.097,-4.191) 14.211,-4.305 14.527,-4.305 14.723,-4.501 U1.4@15.438,-4.501 ; U4.11@16.383,-28.489 v3(17.821,-28.489) ; U4.6@16.383,-20.289 v3(17.749,-20.289) ; C2.1@19.812,-1.016 19.812,-2.921 ccw(c20.066,-2.921) 20.066,-3.175 21.112,-3.175 cw(c21.112,-3.201) U1.15@21.138,-3.201 ; C4.2@25.821,-7.464 C4.2@26.104,-7.747 26.104,-6.285 U2.5@26.232,-6.157 26.482,-6.157 26.681,-5.959 26.681,-5.45 27.178,-4.953 27.178,-3.038 ccw(c26.807,-3.038) R4.2@26.807,-2.667 R4.2@26.708,-2.667
  Top Layer w0.4: P1.12@33.776,-36.544 P1.12@33.827,-36.596
  Bottom Layer w0.203: C9.2@2.032,-18.865 4.445,-18.865 C16.2@4.572,-18.738 ; v3(6.477,-20.574) 7.551,-20.574 C19.2@7.62,-20.505 ; C17.2@6.613,-23.632 6.315,-23.93 6.315,-24.385 6.147,-24.552 v3(6.147,-24.714) 6.147,-24.876 6.364,-25.092 6.364,-25.736 C8.2@6.662,-26.035 ; C25.2@6.985,-29.787 7.035,-29.787 7.868,-30.62 8.141,-30.62 v3(8.255,-30.734) ; C18.2@11.058,-23.632 11.108,-23.582 v3(12.105,-23.582) 12.105,-25.037 C10.2@11.996,-25.146 ; v3(17.749,-20.289) 18.769,-20.289 C3.2@18.923,-20.135 v3(18.923,-18.923) ; v3(17.821,-28.489) 18.591,-28.489 19,-28.898 C5.2@19.05,-28.898
  other v3: 11.049,-5.461 27.305,-3.81 19.812,-1.968
+3.3Vusb: C26.2 R15.1 U4.24 U8.2 | length 9.1
  Top Layer w0.203: U4.24@33.274,-19.189 33.573,-19.487 35.244,-19.487 35.637,-19.881 C26.2@35.687,-19.881 35.986,-20.179 36.581,-20.179 36.848,-20.447 U8.2@37.592,-20.447 37.592,-24.576 R15.1@37.654,-24.638
+5V: C11.2 C12.2 C13.2 C14.2 C15.2 D1.1 P1.2 P1.4 P1.6 P1.8 Y1.5 | length 62.4
  Top Layer w0.4: C15.2@43.18,-1.593 44.131,-1.593 44.365,-1.359 44.365,-1.309 44.465,-1.209 D1.1@44.69,-1.209 45.815,-1.209 46.389,-0.635 v4(46.736,-0.635)
  Top Layer w0.7: P1.8@38.907,-36.596 P1.8@38.919,-36.584
  Bottom Layer w1: Y1.5@15.558,34.353 15.558,34.475 C11.2@17.399,34.475 C12.2@18.923,34.475 19.21,34.475 cw(c19.21,31.935) 21.006,33.731 35.832,18.905 cw(c34.036,17.109) 36.576,17.109 36.576,13.716 ccw(c38.109,13.716) 37.025,12.632 40.353,9.304 40.354,9.303 cw(c37.521,6.468) 41.529,6.468 41.529,6.466 41.529,0 42.609,-1.08 v4@46.546,-1.08 ; P1.6@41.447,-36.596 41.543,-36.5 41.543,-34.599 C14.2@41.852,-34.29 ; P1.4@43.987,-36.596 43.987,-36.461 45.154,-35.294 C13.2@45.154,-34.29
CLK_CMOS: R5.1 U2.1 U5.44 | length 26.4
  Top Layer w0.203: U5.44@13.397,-16.382 13.735,-16.382 13.895,-16.222 13.895,-11.886 16.764,-9.017 28.575,-9.017 30.226,-7.366 R5.1@30.226,-5.832 30.145,-5.913 cw(c29.901,-5.913) 29.901,-6.157 U2.1@28.632,-6.157
COUNT_EN: P1.14 U5.36 | length 28.5
  Top Layer w0.203: U5.36@13.397,-22.782 14.019,-22.782 v3@14.859,-23.622
  Bottom Layer w0.203: v3(14.986,-23.876) 14.986,-29.21 15.431,-29.655 15.431,-33.023 16.002,-33.594 28.285,-33.594 P1.14@31.287,-36.596
CPU_IRQ: P1.18 U5.33 | length 21.8
  Top Layer w0.203: v3(11.747,-28.131) U5.33@11.747,-26.032
  Top Layer w0.4: P1.18@26.176,-36.565 P1.18@26.207,-36.596
  Bottom Layer w0.203: v3(11.747,-28.131) 12.51,-28.131 14.771,-30.392 14.771,-33.313 15.712,-34.254 23.865,-34.254 P1.18@26.207,-36.596
DAC_LDAC: P1.16 U5.34 | length 24.8
  Top Layer w0.203: U5.34@13.397,-24.382 13.735,-24.382 13.895,-24.542 13.895,-25.071 v3(14.097,-25.273)
  Bottom Layer w0.203: v3(14.097,-25.273) 14.097,-25.435 14.351,-25.689 14.351,-29.297 15.101,-30.047 15.101,-33.177 15.848,-33.924 26.075,-33.924 P1.16@28.747,-36.596